# EAGLE board tiu_tracking_detector (EAGLE 5.11)
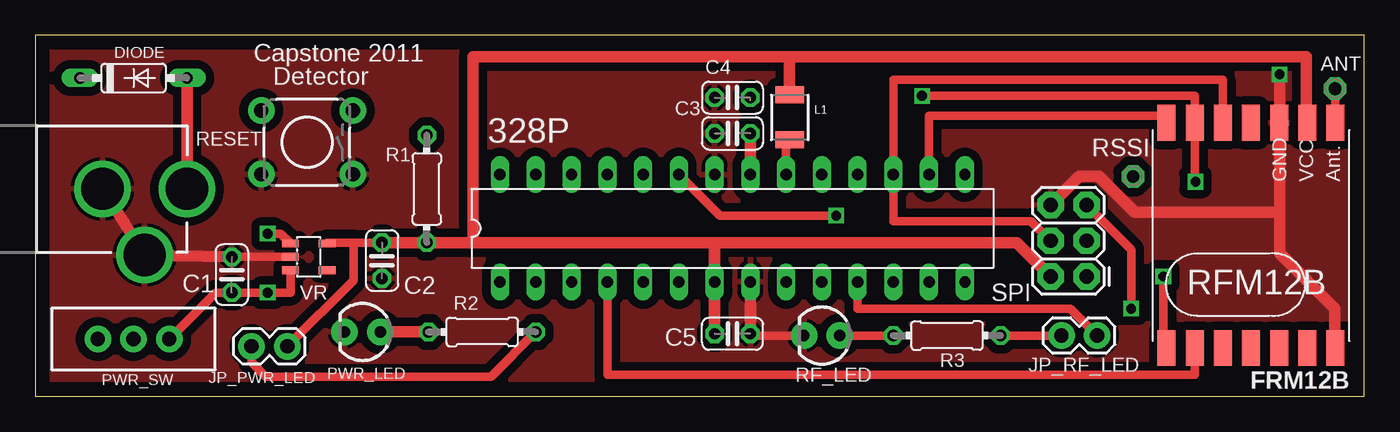
[diagram p0: board, top side]
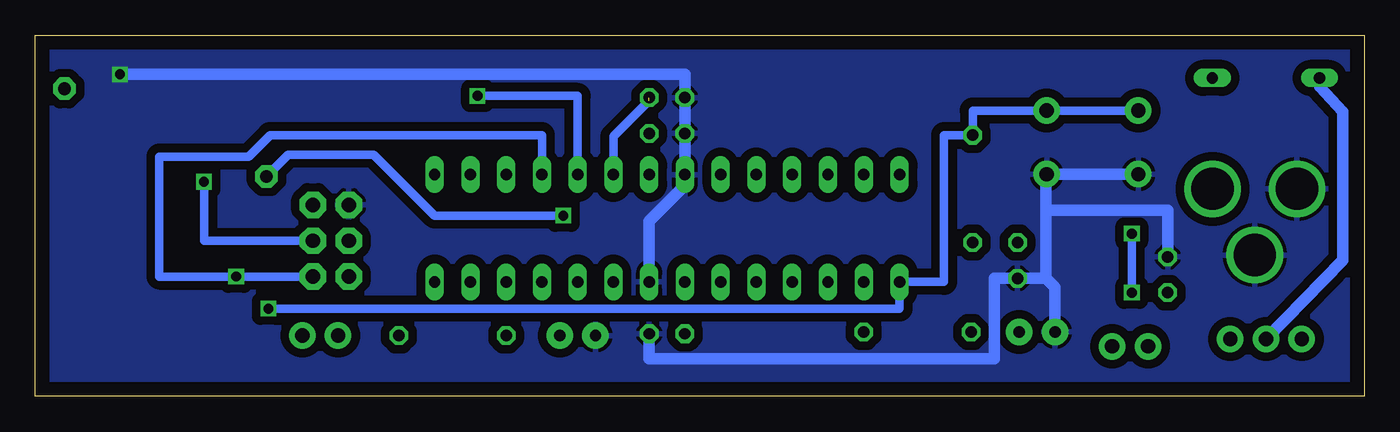
[diagram p1: board, bottom side, seen from below]

Size 94.41 x 25.64 mm. Coordinates in mm from the lower left corner, seen from the top.
Outline: 0,0 94.41,0 94.41,25.64 0,25.64 0,0
Copper layers (1*16): Top 0.035mm / dielectric 1.5mm / Bottom 0.035mm
Design rules "default *": minimum track width 10mil, minimum drill 24mil, track to track 8mil, track to pad 8mil, pad to pad 8mil, via to via 8mil, smd to smd 8mil, copper to edge 40mil, drill to drill 8mil, minimum pad ring 10mil, minimum via ring 8mil, stop-mask expansion 4mil, vias tented up to drill 0mil, thermal gap 10mil
Net classes: 1 power: width 0.381 mm, clearance 0.254 mm

## Footprints (pad centres in the part's own frame; a part is rotated, then mirrored left to right if it is on the bottom)
DIL28-3 = drill 0.813 long: 1 -16.51,-3.81; 2 -13.97,-3.81; 3 -11.43,-3.81; 4 -8.89,-3.81; 5 -6.35,-3.81; 6 -3.81,-3.81; 7 -1.27,-3.81; 8 1.27,-3.81; 9 3.81,-3.81; 10 6.35,-3.81; 11 8.89,-3.81; 12 11.43,-3.81; 13 13.97,-3.81; 14 16.51,-3.81; 15 16.51,3.81; 16 13.97,3.81; 17 11.43,3.81; 18 8.89,3.81; 19 6.35,3.81; 20 3.81,3.81; 21 1.27,3.81; 22 -1.27,3.81; 23 -3.81,3.81; 24 -6.35,3.81; 25 -8.89,3.81; 26 -11.43,3.81; 27 -13.97,3.81; 28 -16.51,3.81
1,6/0,8 = drill 0.9 pad 1.6 octagon: 1 0,0
C025-024X044 = drill 0.813 octagon: 1 -1.27,0; 2 1.27,0
DO35-7 = drill 0.813 long: A 3.81,0; C -3.81,0
RFM12B = smd 2.54 x 1.27: ANT 8,-6; FFS -8,2; GND 8,-2; IRQ -8,4; P$8 -8,0; P$9 -8,-2; P$10 -8,-4; P$12 -8,-6; P$16 8,0; SCK 8,4; SDI 8,2; SDO -8,6; SEL 8,6; VDD 8,-4
POWER_JACK_PTH = drill 2.997 round: GND 0,7.7; GNDBREAK 4.7,10.7; PWR 0,13.7
1X02 = drill 1.016 pad 1.88 round: 1 0,0; 2 2.54,0
1210 = smd 1.2 x 2: 1 -1.6,0; 2 1.6,0
LED3MM = drill 0.813 pad 1.88 round: A -1.27,0; K 1.27,0
SWITCH-SPDT = drill 1.016 pad 1.88 round: 1 0,2.54; 2 0,0; 3 0,-2.54
0204/7 = drill 0.813 octagon: 1 -3.81,0; 2 3.81,0
TACTILE-PTH = drill 1.016 pad 1.88 round: 1 -3.251,2.261; 2 3.251,2.261; 3 -3.251,-2.261; 4 3.251,-2.261
2X3 = drill 1.016 pad 1.88 octagon: 1 0,0; 2 0,2.54; 3 2.54,0; 4 2.54,2.54; 5 5.08,0; 6 5.08,2.54
SOT23-5L = smd 0.55 x 1.2: 1 -0.95,-1.3; 2 0,-1.3; 3 0.95,-1.3; 4 0.95,1.3; 5 -0.95,1.3

## Placement (x,y rotation side)
328P  ATMEGA 328  [DIL28-3]  49.53,11.94 0 top
ANT  [1,6/0,8]  92.33,21.84 0 top
C1  1µ  [C025-024X044]  13.97,8.64 90 top
C2  1µ  [C025-024X044]  24.64,9.65 270 top
C3  0.1µ  [C025-024X044]  49.53,18.67 180 top
C4  0.1µ  [C025-024X044]  49.53,21.21 180 top
C5  0.1µ  [C025-024X044]  49.53,4.45 0 top
DIODE  1N4148DO35-7  [DO35-7]  6.99,22.61 0 top
FRM12B  RFM12B  [RFM12B]  86.36,11.43 90 top
J1  POWER_JACKPTH  [POWER_JACK_PTH]  -2.92,14.73 270 top
JP_PWR_LED  [1X02]  17.91,3.56 180 top
JP_RF_LED  [1X02]  75.44,4.32 180 top
L1  10uH  [1210]  53.59,19.81 270 top
PWR_LED  [LED3MM]  23.24,4.57 180 top
PWR_SW  [SWITCH-SPDT]  6.99,4.06 270 top
R1  10k  [0204/7]  27.81,14.73 270 top
R2  1k  [0204/7]  31.75,4.57 0 top
R3  1k  [0204/7]  64.77,4.32 0 top
RESET  [TACTILE-PTH]  19.3,18.03 180 top
RF_LED  [LED3MM]  55.88,4.32 180 top
RSSI  [1,6/0,8]  77.98,15.62 0 top
SPI  AVR_SPI_PRG_6PTH  [2X3]  74.68,8.51 90 top
VR  TPS769XX  [SOT23-5L]  19.43,9.91 270 top

## Library data of the parts
328P = atmega8
ANT FRM12B RSSI = JeeLabs
C1-C5 R1-R3 = resistor
DIODE = diode
J1 JP_PWR_LED JP_RF_LED L1 PWR_LED PWR_SW RESET RF_LED SPI = SparkFun
VR = tps769xx

## Nets
GND [power]: 328P.8 328P.22 C1.2 C2.2 C3.2 C4.2 C5.2 FRM12B.GND J1.GND J1.GNDBREAK PWR_LED.K RESET.1 RESET.2 RF_LED.K SPI.6 VR.2
N$1: 328P.1 R1.1 RESET.3 RESET.4 SPI.5
N$2: 328P.18 FRM12B.SDO SPI.1
N$3: 328P.17 FRM12B.SDI SPI.4
N$4: 328P.16 FRM12B.SEL
N$5: 328P.19 FRM12B.SCK SPI.3
N$6: 328P.23 RSSI.1
N$7: 328P.4 FRM12B.IRQ
N$8: DIODE.A J1.PWR
N$9: DIODE.C PWR_SW.2
N$10: C1.1 PWR_SW.1 VR.1 VR.3
N$11: PWR_LED.A R2.1
N$12: R3.1 RF_LED.A
N$13: ANT.1 FRM12B.ANT
N$14: 328P.11 JP_RF_LED.1
N$15: JP_RF_LED.2 R3.2
N$16: JP_PWR_LED.2 R2.2
N$17 [power]: 328P.20 C4.1 L1.2
N$19: 328P.21 C3.1
VCC [power]: 328P.7 C2.1 C5.1 FRM12B.VDD JP_PWR_LED.1 L1.1 R1.2 SPI.2 VR.5

## Tracks (layer width: path | path; a pad name or v marks a point on that pad's centre or on a via)
GND  (via drill 0.7)
  Top 0.61: RF_LED.K 50.8,4.32 C5.2 | C1.2 VR.2
  Top 0.813: C5.2 328P.8 | J1.GND J1.GNDBREAK C1.2 | v88.39,22.86 88.39,19.43 | 88.39,19.43 FRM12B.GND | 88.39,19.43 88.39,13.08 | 88.39,13.08 88.39,10.16 92.33,6.22 92.33,3.17 | SPI.6 74.17,15.62 75.56,15.62 78.11,13.08 88.39,13.08
  Bottom 0.61: 22.61,15.77 RESET.1
  Bottom 0.813: 22.61,8.38 C2.2 26.29,8.38 26.29,2.67 50.8,2.67 C5.2 | 22.61,13.21 22.61,8.38 | 22.61,13.21 13.97,13.21 C1.2 | PWR_LED.K 21.97,7.75 22.61,8.38 | RESET.1 RESET.2 | 22.61,13.21 22.61,15.77 | v88.39,22.86 48.26,22.86 C4.2 C3.2 328P.22 48.26,14.99 50.8,12.45 328P.8
  pour Top (isolate 0.61): 0,25.65 94.36,25.65 94.49,0 0,0
  pour Bottom (isolate 0.61): 0,25.65 0,0 94.49,0 94.36,25.65
N$1  (via drill 0.7)
  Top 0.61: SPI.5 77.85,10.41 v77.85,6.22
  Bottom 0.61: RESET.4 RESET.3 27.81,20.3 R1.1 29.84,18.54 29.84,8.13 328P.1 33.02,6.22 v77.85,6.22
N$2  (via drill 0.7)
  Top 0.61: FRM12B.SDO 80.14,3.43 v80.14,8.51
  Bottom 0.61: 328P.18 58.42,18.54 77.72,18.54 79.25,17.02 85.6,17.02 85.6,8.51 v80.14,8.51 SPI.1
N$3
  Top 0.61: FRM12B.SDI 84.36,22.48 60.96,22.48 328P.17 60.96,12.45 70.74,12.45 SPI.4
N$4
  Top 0.61: 328P.16 63.5,19.94 80.36,19.94 FRM12B.SEL
N$5  (via drill 0.7)
  Top 0.61: v62.99,21.34 82.36,21.34 FRM12B.SCK 82.36,15.62 v82.42,15.24
  Bottom 0.61: v62.99,21.34 55.88,21.34 328P.19 | SPI.3 82.42,11.05 v82.42,15.24
N$6  (via drill 0.7)
  Top 0.61: 328P.23 48.64,12.83 v56.9,12.83
  Bottom 0.61: v56.9,12.83 66.04,12.83 70.36,17.14 76.45,17.14 RSSI.1
N$7
  Top 0.61: FRM12B.IRQ 82.36,1.52 40.64,1.52 328P.4
N$8
  Top 0.813: DIODE.A 10.79,14.73 J1.PWR
N$9
  Bottom 0.813: PWR_SW.2 1.52,9.65 1.52,20.19 3.17,21.97 DIODE.C
N$10  (via drill 0.7)
  Top 0.61: PWR_SW.1 12.83,7.37 C1.1 v16.51,7.37 18.13,7.37 VR.3 | VR.1 17.43,11.56 v16.51,11.56
  Bottom 0.61: v16.51,7.37 v16.51,11.56
N$11
  Top 0.813: PWR_LED.A R2.1
N$12
  Top 0.61: RF_LED.A R3.1
N$13
  Top 0.61: ANT.1 92.36,21.84 FRM12B.ANT
N$14
  Top 0.61: JP_RF_LED.1 73.53,6.22 58.42,6.22 328P.11
N$15
  Top 0.61: R3.2 JP_RF_LED.2
N$16
  Top 0.61: JP_PWR_LED.2 15.37,2.41 16.38,1.4 32.38,1.4 R2.2
N$17  (1 unrouted)
  Top 0.61: 53.34,17.96 L1.2 53.52,18.29 53.34,18.29 328P.20
  Bottom 0.61: 50.8,21.01 53.34,18.47 328P.20
N$19
  Top 0.813: 328P.21 C3.1
VCC
  Top 0.61: VR.5 20.73,10.92 22.61,10.92 | 22.61,10.92 C2.1 | JP_PWR_LED.1 22.61,8.26 22.61,10.92
  Top 0.813: C5.1 328P.7 48.26,10.92 | C2.1 R1.2 31.11,10.92 | FRM12B.VDD 90.3,19.43 90.3,24.13 53.59,24.13 | 53.59,21.28 L1.1 53.59,24.13 | 31.11,10.92 31.11,24.13 53.59,24.13 | SPI.2 69.72,10.92 48.26,10.92 | 31.11,10.92 48.26,10.92
  Bottom 0.61: C5.1 48.26,4.57

## Text on the board
tNames: Capstone 2011 | Detector | RFM12B